# Altium PCB 4layer_main_board.PcbDoc
Units mm, origin at the board's own origin, x right, y up, seen from the top; angles counter-clockwise.
Board outline 50 x 100 mm, 4 copper layers (Top Layer, Int1 (GND), Int2 (PWR), Bottom Layer), stack 1.369 mm thick; 35 components, 28 nets, 214 pads, 441 vias.
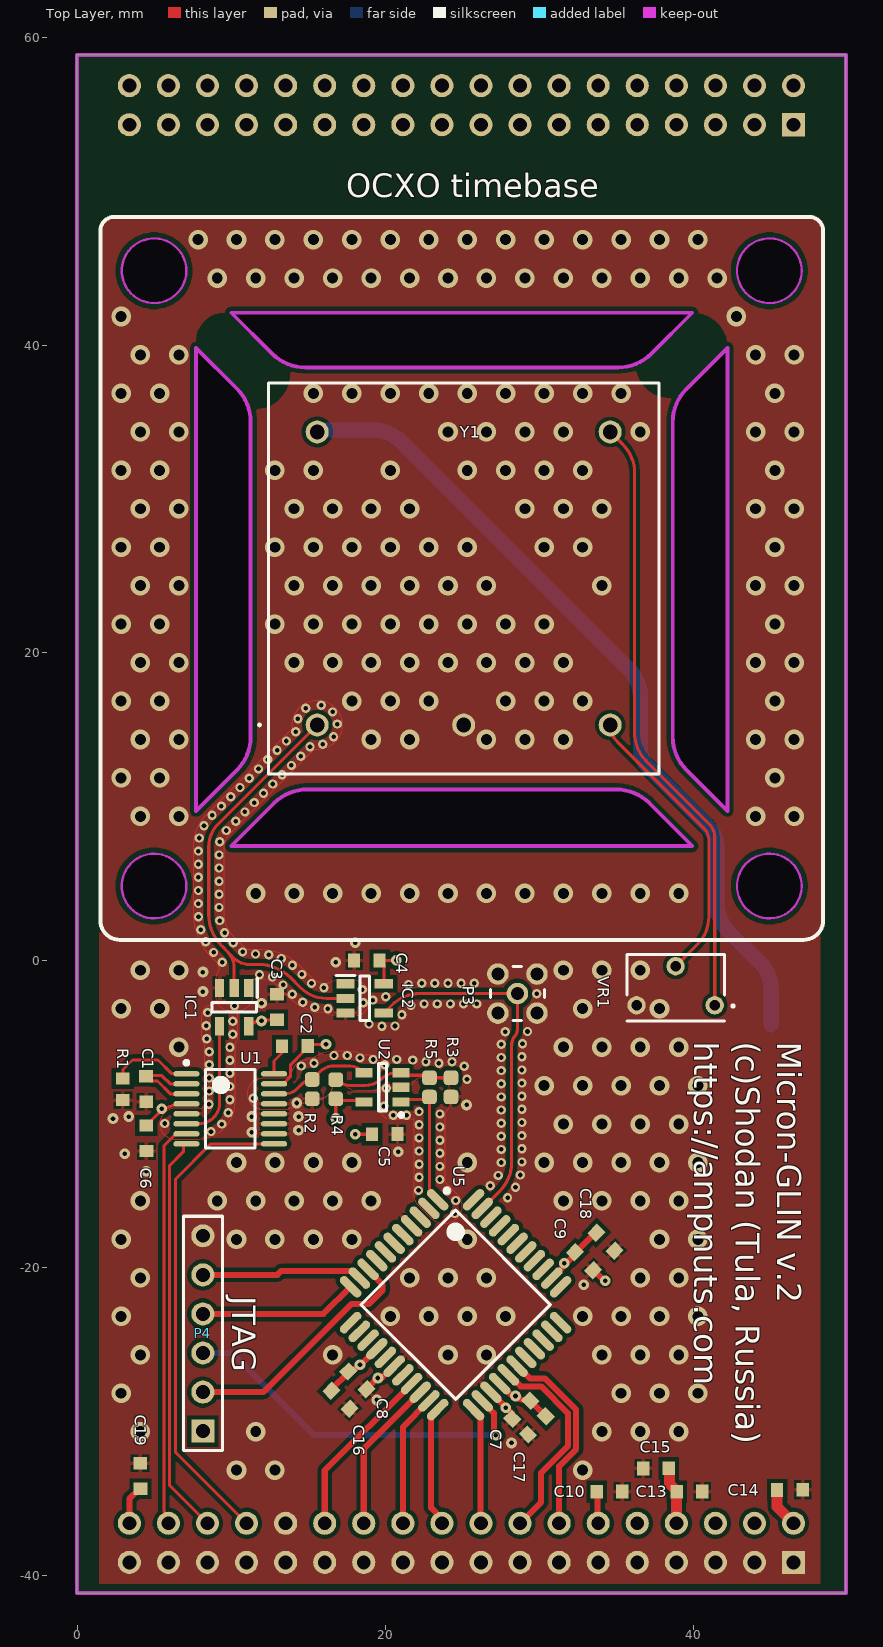
[diagram p0: Top Layer view]
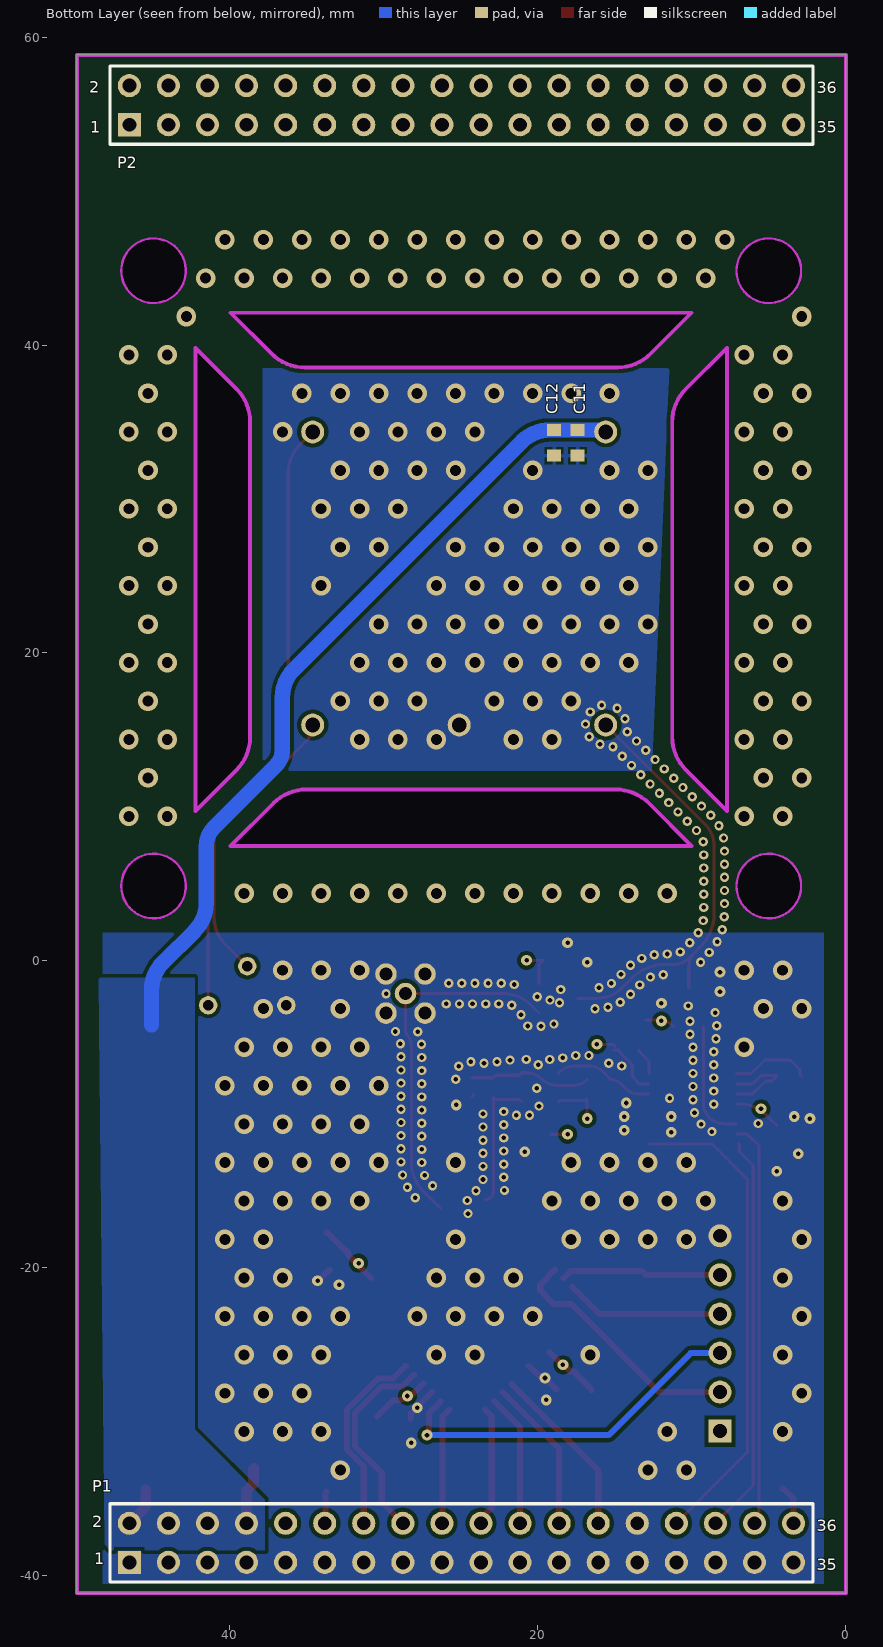
[diagram p1: Bottom Layer view, seen from below]
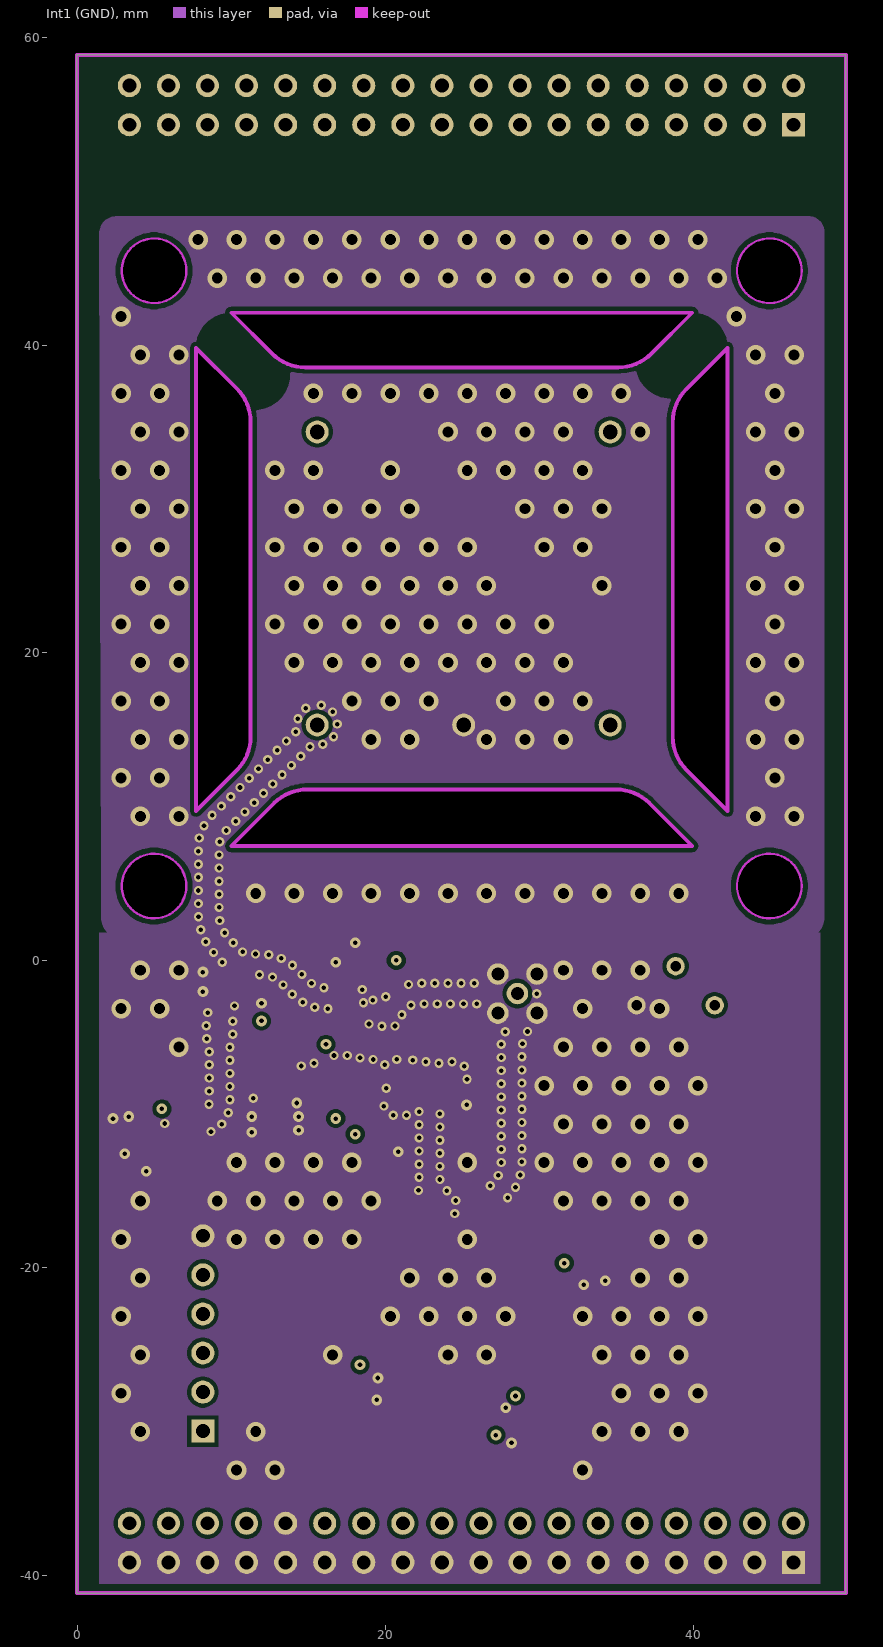
[diagram p2: Int1 (GND)]
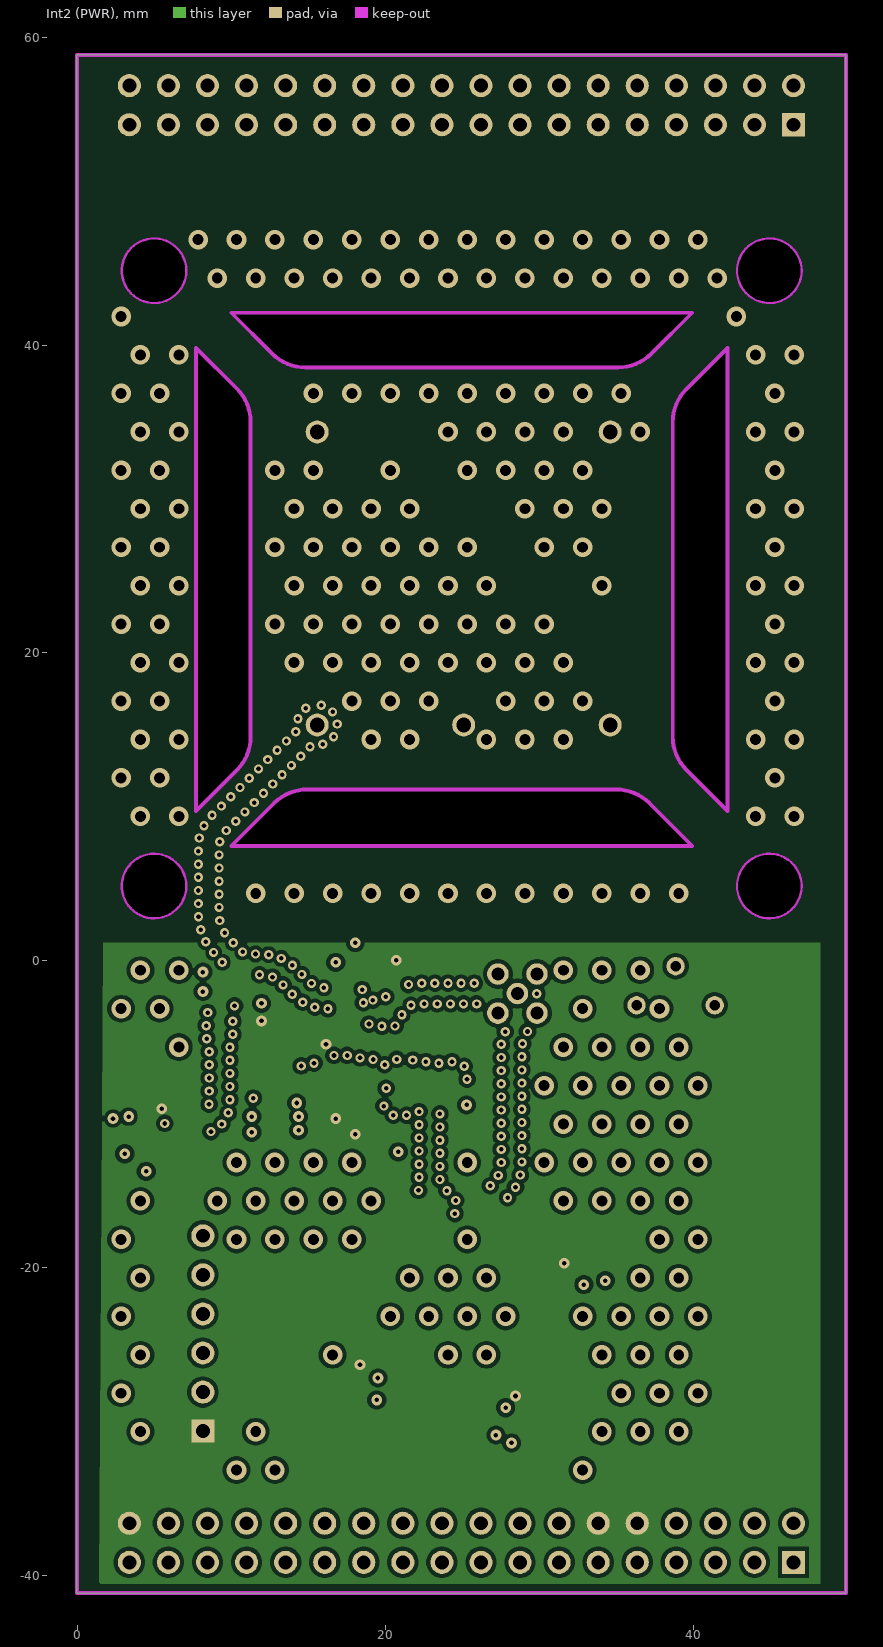
[diagram p3: Int2 (PWR)]

## Layer stack, top to bottom
Top Solder: solder mask 0.0254, SM-001, Dk 4
Top Layer: signal copper 0.035
Dielectric 1: prepreg 0.1295, PP-017, Dk 4.3
Dielectric 2: prepreg 0.1295, PP-017, Dk 4.3
Int1 (GND): signal copper 0.035
Dielectric 3: core 0.7112, Core-039, Dk 4.8
Int2 (PWR): signal copper 0.035
Dielectric 4: prepreg 0.1295, PP-017, Dk 4.3
Dielectric 5: prepreg 0.1295, PP-017, Dk 4.3
Bottom Layer: signal copper 0.035
Bottom Solder: solder mask 0.0254, SM-001, Dk 4

## Board outline
-0.063,-41.136 49.937,-41.136 49.937,58.864 -0.063,58.864
cut-out: 39.57,12.373 cw(c41.738,14.541) 38.672,14.541 38.672,34.988 cw(c41.738,34.988) 39.57,37.156 42.228,39.814 42.228,9.715
cut-out: 9.97,7.429 12.755,10.214 cw(c14.923,8.046) 14.923,11.112 34.989,11.112 cw(c34.989,8.046) 37.157,10.214 39.942,7.429
cut-out: 7.684,9.715 7.684,39.814 10.342,37.156 cw(c8.174,34.988) 11.24,34.988 11.24,14.541 cw(c8.174,14.541) 10.342,12.373
cut-out: 12.628,39.442 ccw(c14.796,41.61) 14.796,38.544 35.116,38.544 ccw(c35.116,41.61) 37.284,39.442 39.942,42.1 9.97,42.1
cut-out: 44.953,42.731 cw(c44.953,44.831) 42.853,44.831 cw(c44.953,44.831) 44.953,46.931 cw(c44.953,44.831) 47.053,44.831 cw(c44.953,44.831)
cut-out: 42.853,4.831 ccw(c44.953,4.831) 44.953,2.731 ccw(c44.953,4.831) 47.053,4.831 ccw(c44.953,4.831) 44.953,6.931 ccw(c44.953,4.831)
cut-out: 4.953,2.731 cw(c4.953,4.831) 2.853,4.831 cw(c4.953,4.831) 4.953,6.931 cw(c4.953,4.831) 7.053,4.831 cw(c4.953,4.831)
cut-out: 4.953,42.731 cw(c4.953,44.831) 2.853,44.831 cw(c4.953,44.831) 4.953,46.931 cw(c4.953,44.831) 7.053,44.831 cw(c4.953,44.831)

## Design rules (kind name [scope] priority, off if disabled: settings)
BoardOutlineClearance [All] p1: gap=0.381 ignorepadtopadclearanceinfootprint=FALSE
Clearance "Clearance Polygons" [InPolygon] p1: gap=0.254 ignorepadtopadclearanceinfootprint=FALSE except(0: Arc-Hole Track-Hole SMDPad-Hole THPad-Hole Via-Hole Fill-Hole Poly-Hole Region-Hole Text-Hole)
Clearance [All] p2: gap=0.127 ignorepadtopadclearanceinfootprint=FALSE except(0: Arc-Hole Track-Hole SMDPad-Hole THPad-Hole Via-Hole Fill-Hole Poly-Hole Region-Hole Text-Hole)
ComponentClearance "HM-TRP & UFL" [InComponent('X1') vs InComponent('U1')] p1: gap=0 collisioncheckmode=3 verticalgap=0 showdistances=FALSE
ComponentClearance [All] p2: gap=0.025 collisioncheckmode=3 verticalgap=0.025 showdistances=FALSE
DiffPairsRouting [All] p1: maxlimit=10 minlimit=0.127 mostfreqgap=0.203 toplayer_minwidth=0.127 toplayer_maxwidth=0.381 toplayer_prefwidth=0.203 midlayer1_minwidth=0.127 midlayer1_maxwidth=0.381 midlayer1_prefwidth=0.203 midlayer2_minwidth=0.127 midlayer2_maxwidth=0.381 midlayer2_prefwidth=0.203 bottomlayer_minwidth=0.127 bottomlayer_maxwidth=0.381 bottomlayer_prefwidth=0.203 maxuncoupledlength=12.7
HoleSize [All] p1: absolutevalues=TRUE maxlimit=6.731 minlimit=0.254 maxpercent=80.000 minpercent=20.000
HoleToHoleClearance [All] p1: gap=0.254 allowstackedmicrovias=FALSE
MinimumAnnularRing [All] p1: minimumring=0.102
MinimumSolderMaskSliver [All] p1: minsoldermaskwidth=0
PlaneClearance [All] p1: clearance=0.254
PlaneConnect [All] p1: planeconnectstyle=Relief reliefexpansion=0.102 reliefentries=4 reliefconductorwidth=0.152 reliefairgap=0.152
PolygonConnect PolygonConnect_pwr_gnd [IsPoly] p1: thpad.connectstyle=Direct thpad.reliefconductorwidth=0.254 thpad.reliefentries=4 thpad.polygonreliefangle="90 Angle" thpad.airgapwidth=0.152 smdpad.connectstyle=Relief smdpad.reliefconductorwidth=0.254 smdpad.reliefentries=4 smdpad.polygonreliefangle="90 Angle" smdpad.airgapwidth=0.152 via.connectstyle=Direct via.reliefconductorwidth=0.254 via.reliefentries=4 via.polygonreliefangle="90 Angle" via.airgapwidth=0.152
PolygonConnect PolygonConnect_1 [All] p2: connectstyle=Relief reliefconductorwidth=0.254 reliefentries=4 polygonreliefangle="90 Angle" airgapwidth=0.254
PolygonConnect "Via connect style" [isVia] p3: connectstyle=Direct reliefconductorwidth=0.254 reliefentries=4 polygonreliefangle="90 Angle" airgapwidth=0.254
RoutingCorners [All] p1: cornerstyle=45-Degree minsetback=1.25 maxsetback=1.25
RoutingVias [All] p1: holewidth=0.305 width=0.559 viastyle="Through Hole" minholewidth=0.254 minwidth=0.457 maxholewidth=2.54 maxwidth=2.896
SilkToSilkClearance [All] p1: silktosilkclearance=0
SilkToSolderMaskClearance [IsPad] p1: minsilkscreentomaskgap=0.127 clearancetoexposedcopper=TRUE
SolderMaskExpansion [All] p1: expansion=0.064 istentingtop=FALSE
Width GND [InNet('GND')] p1: maxlimit=0.762 minlimit=0.254 preferedwidth=0.508
Width Power [InNetClass('Power')] p2: maxlimit=1.016 minlimit=0.508 preferedwidth=0.762
Width 3V3 [InNetClass('3V3')] p3: maxlimit=0.762 minlimit=0.254 preferedwidth=0.508
Width [All] p4: maxlimit=10.16 minlimit=0.152 preferedwidth=0.203
20 further rules are at their usual default settings.

## Classes and differential pairs
component class v2: P1 P2
component class shcematics: C1 C2 C3 C4 C5 C6 C7 C8 C9 C10 C11 C12 C13 C14 C15 C16 C17 C18 C19 IC1 IC2 P3 P4 R1 R2 R3 R4 R5 U1 U2 U5 VR1 Y1

## Components (designator, comment, footprint, x,y, rotation, side; value= is the part's Value field where it differs from the comment)
C1 "10nF" "CAP 0603" 4.445,-8.382 r270 top
C2 "10nF" "CAP 0603" 14.097,-5.588 r180 top
C3 "100nF" "CAP 0603" 12.954,-3.048 r270 top
C4 "100nF" "CAP 0603" 18.796,0 r0 top
C5 "100nF" "CAP 0603" 19.939,-11.303 r180 top
C6 "100nF" "CAP 0603" 4.445,-11.557 r90 top
C7 "100nF" "CAP 0603" 28.829,-29.21 r45 top
C8 "100nF" "CAP 0603" 18.161,-27.305 r135 top
C9 "100nF" "CAP 0603" 32.893,-19.558 r135 top
C10 "100nF" "CAP 0603" 34.544,-34.544 r180 top
C11 "100nF" "CAP 0603" 17.399,33.655 r90 bottom
C12 "10uF" "CAP 0603" 18.923,33.655 r90 bottom
C13 "100nF" "CAP 0603" 39.751,-34.544 r180 top
C14 "10nF" "CAP 0603" 46.277,-34.427 r180 top
C15 "1uF" "CAP 0603" 37.592,-33.02 r0 top
C16 "10nF" "CAP 0603" 17.064,-28.554 r135 top
C17 "10nF" "CAP 0603" 29.845,-30.226 r45 top
C18 "10nF" "CAP 0603" 34.29,-18.288 r135 top
C19 "1uF" "CAP 0603" 4.064,-33.528 r270 top
IC1 "SN74LV1T34DBVR" SOT95P280X145-5N 10.16,-3.048 r270 top
IC2 "SN74LV1T34DBVR" SOT95P280X145-5N 18.649,-2.474 r0 top
P1 "Header 18X2" HDR2X18 46.527,-39.136 r180 bottom locked
P2 "Header 18X2" HDR2X18 46.527,54.324 r180 bottom locked
P3 "MMCX" MMCX2.54-V5 28.575,-2.159 r0 top
P4 "JTAG" HDR1X6 8.128,-30.607 r90 top
R1 "3.9K" 1608[0603] 2.921,-8.382 r270 top
R2 "300R" "Yegeo 0603" 15.24,-8.372 r90 top
R3 "10K" "Yegeo 0603" 24.257,-8.255 r270 top
R4 "50K" "Yegeo 0603" 16.764,-8.382 r270 top
R5 "100K" "Yegeo 0603" 22.86,-8.255 r90 top
U1 "AD9832BRUZ" ADI-RU-16_N 9.906,-9.652 r0 top
U2 "LTC6752HS5" TI-DBV5_N 19.812,-8.255 r180 top
U5 "XC9572XL-10VQG44C" VQG44_N 24.557,-22.387 r315 top
VR1 "3266W-1-103LF" 3266W 38.862,-3.941 r180 top
Y1 "Vectron C4550A1-0213" C4550C508SV120RFSA11128MHZ 15.558,15.303 r0 top locked

## Footprints (in the part's own frame and the unit in brackets; to place one, negate y for a bottom-side part, rotate by r counter-clockwise, add the part's x,y. Pads: shape width x height; smd on the part's side, far side on the other; paste and mask are expansions set on the pad)
1608[0603] [mm]
  rect 0.8x0.9 smd: 1(-0.7,0) 2(0.7,0)
  body extent -0.87,-0.48 0.87,0.48, height 1.3
3266W [mm]
  round 1.19 hole 0.69: 1(-2.54,-1.02) 2(0,-3.56) 3(2.54,-1.02)
  silkscreen extent -3.81,-4.31 3.18,0, body extent -3.4,-4.5 3.3,0, height 8.52
ADI-RU-16_N [mm]
  oval 1.7x0.35 smd: 1(-2.85,2.275) 2(-2.85,1.625) 3(-2.85,0.975) 4(-2.85,0.325) 5(-2.85,-0.325) 6(-2.85,-0.975) 7(-2.85,-1.625) 8(-2.85,-2.275) 9(2.85,-2.275) 10(2.85,-1.625) 11(2.85,-0.975) 12(2.85,-0.325) 13(2.85,0.325) 14(2.85,0.975) 15(2.85,1.625) 16(2.85,2.275)
  silkscreen extent -2.97,-2.55 1.6,3.12, body extent -2.25,-2.55 2.25,2.55, height 1.2
C4550C508SV120RFSA11128MHZ [mm]
  round 1.493 hole 0.96: 1(0,0) 2(9.525,0) 3(19.05,0) 4(19.05,19.05) 5(0,19.05)
  silkscreen extent -3.8,-3.17 22.22,22.22, body extent -3.17,-3.17 22.22,22.22, height 11.35
"CAP 0603" [mm] "Chip Capacitor, 2-Leads, Body 1,60x0,80mm, IPC Medium Density"
  rect 0.8x0.9 smd: 1(-0.84,-0.01) 2(0.82,0)
  body extent -0.85,-0.45 0.85,0.45, height 0.8
HDR1X6 [mm] "Connector; Header; 6 Position"
  rect 1.5x1.5 hole 0.9: 1(0,0)
  round 1.5 hole 0.9: 2(2.54,0) 3(5.08,0) 4(7.62,0) 5(10.16,0) 6(12.7,0)
  silkscreen extent -1.27,-1.27 13.97,1.27
HDR2X18 [mm] "Connector; Header; 18x2 Position"
  rect 1.5x1.5 hole 0.9: 1(0,0)
  round 1.5 hole 0.9: 2(0,2.54) 3(2.54,0) 4(2.54,2.54) 5(5.08,0) 6(5.08,2.54) 7(7.62,0) 8(7.62,2.54) 9(10.16,0) 10(10.16,2.54) 11(12.7,0) 12(12.7,2.54) 13(15.24,0) 14(15.24,2.54) 15(17.78,0) 16(17.78,2.54) 17(20.32,0) 18(20.32,2.54) 19(22.86,0) 20(22.86,2.54) 21(25.4,0) 22(25.4,2.54) 23(27.94,0) 24(27.94,2.54) 25(30.48,0) 26(30.48,2.54) 27(33.02,0) 28(33.02,2.54) 29(35.56,0) 30(35.56,2.54) 31(38.1,0) 32(38.1,2.54) 33(40.64,0) 34(40.64,2.54) 35(43.18,0) 36(43.18,2.54)
  silkscreen extent -1.27,-1.27 44.45,3.81
MMCX2.54-V5 [mm]
  round 1.4 hole 0.85: 1(0,0) 2(-1.27,-1.27) 3(1.27,-1.27) 4(1.27,1.27) 5(-1.27,1.27)
  silkscreen extent -1.75,-1.75 1.75,1.75, body extent -1.78,-1.75 1.73,1.75, height 4.42
SOT95P280X145-5N [mm]
  rect 1.2x0.6 smd: 1(-1.25,0.95) 2(-1.25,0) 3(-1.25,-0.95) 4(1.25,-0.95) 5(1.25,0.95)
  silkscreen extent -1.85,-1.45 0.3,1.5, body extent -1.4,-1.45 1.4,1.45, height 1.2
TI-DBV5_N [mm] "SOT23, 5-Leads, Body 2.9x1.6mm, Pitch 0.95mm, IPC Medium Density"
  rect 1.1x0.6 smd: 1(-1.2,0.95) 2(-1.2,0) 3(-1.2,-0.95) 4(1.2,-0.95) 5(1.2,0.95)
  silkscreen extent -1.33,-1.55 0.25,1.92, body extent -0.87,-1.52 0.87,1.53, height 1.45
VQG44_N [mm] "Thin QFP, 44-Leads, Body 10x10mm, Pitch 0.8mm, IPC Medium Density"
  oval 1.75x0.55 smd: 1(-5.65,4) 2(-5.65,3.2) 3(-5.65,2.4) 4(-5.65,1.6) 5(-5.65,0.8) 6(-5.65,0) 7(-5.65,-0.8) 8(-5.65,-1.6) 9(-5.65,-2.4) 10(-5.65,-3.2) 11(-5.65,-4) 23(5.65,-4) 24(5.65,-3.2) 25(5.65,-2.4) 26(5.65,-1.6) 27(5.65,-0.8) 28(5.65,0) 29(5.65,0.8) 30(5.65,1.6) 31(5.65,2.4) 32(5.65,3.2) 33(5.65,4)
  oval 0.55x1.75 smd: 12(-4,-5.65) 13(-3.2,-5.65) 14(-2.4,-5.65) 15(-1.6,-5.65) 16(-0.8,-5.65) 17(0,-5.65) 18(0.8,-5.65) 19(1.6,-5.65) 20(2.4,-5.65) 21(3.2,-5.65) 22(4,-5.65) 34(4,5.65) 35(3.2,5.65) 36(2.4,5.65) 37(1.6,5.65) 38(0.8,5.65) 39(0,5.65) 40(-0.8,5.65) 41(-1.6,5.65) 42(-2.4,5.65) 43(-3.2,5.65) 44(-4,5.65)
  silkscreen extent -5.77,-4.35 4.35,4.95, body extent -5,-5 5,5, height 1.2
"Yegeo 0603" [mm]
  rrect50% 0.95x0.95 smd: 1(-0.625,0) 2(0.625,0)
  body extent -0.85,-0.45 0.85,0.45, height 0.8

## Part data
C1 C2 C3 C4 C5 C6 C7 C8 C9 C10 C11 C12 C13 C14 C15 C16 C17 C18 C19: library part "Cap Semi", "Capacitor (Semiconductor SIM Model)", LatestRevisionDate=29-May-2009, LatestRevisionNote="IPC-7351 Footprint Added.", Order=CC0603KRX7R8BB104, PackageDescription="Chip Capacitor", PackageReference=C1206, Published=8-Jun-2000, Publisher="Altium Limited"
IC1 IC2: "Integrated Circuit", Manufacturer_Name="Texas Instruments", Mouser Part Number=595-SN74LV1T34DBVR, Arrow Part Number=SN74LV1T34DBVR, Arrow Price/Stock=https://www.arrow.com/en/products/sn74lv1t34dbvr/texas-instruments?region=nac, Datasheet Link=http://www.ti.com/lit/gpn/sn74lv1t34, Height=1.45mm, Manufacturer_Part_Number=SN74LV1T34DBVR, Mouser Price/Stock=https://www.mouser.co.uk/ProductDetail/Texas-Instruments/SN74LV1T34DBVR?qs=8sOby8ZxZLE4ekkxA3S6Wg%3D%3D
P1 P2: "Header, 18-Pin, Dual row", LatestRevisionDate=17-Jul-2002, LatestRevisionNote="Re-released for DXP Platform.", Publisher="Altium Limited"
P3: library part COAX-M, "RF Coaxial PCB Connector, MMCX; Thru-Hole, Vertical Mount Plug,  50 Ohm Impedance", PackageDocument="Rev. A, 16-Jun-1997", ComponentLink1Description="Manufacturer Link", ComponentLink1URL=http://www.amphenolrf.com/, DatasheetDocument=30-May-2003, DrillSize="Corresponds to nominal value.", LatestRevisionDate=15-Jul-2004, LatestRevisionNote="Component Replaced.", PackageReference=908-21103, PCB_Layout="Complies with manufacturer's recommendation.", Published=15-Jul-2004, Publisher="Altium Limited"
P4: library part "Header 6", "Header, 6-Pin", LatestRevisionDate=17-Jul-2002, LatestRevisionNote="Re-released for DXP Platform.", Publisher="Altium Limited"
R1 R2 R3 R4 R5: library part "Resistor 0805", Avail=20, Order=ERA-3AEB49R9V
U1: "25 MHz Direct Digital Synthesizer, Waveform Generator, 10-Bit, Serial, RU-16, 96 Tube, Pb-Free", Code_JEDEC=MO-153AB, Compliance Range (V)=1.35V, ComponentLink1Description="Manufacturer URL", ComponentLink1URL=www.analog.com, ComponentLink2Description=Datasheet, ComponentLink2URL=http://www.analog.com/static/imported-files/data_sheets/AD9832.pdf, ComponentLink3Description="Package Specification", ComponentLink3URL=http://www.analog.com/static/imported-files/packages/36244347913743854010197452789RU16.pdf, DatasheetVersion="Rev. C", FS Iout (mA nom)=4mA, I Supply total (max)=15mA, I/O Interface=Serial, Master fclk=25MHz, PackageDescription="16-Lead Thin Shrink Small Outline Package [TSSOP]", PackageReference=RU-16, PackageVersion=Nov-2002, REFCLK Multiplier=No, Resolution (Bits)=10bit, Tuning Word Width (bits)=32bit
U2: library part OPA353NA/250, "High-Speed, Single-Supply, Rail-to-Rail Operational Amplifier MicroAmplifier(TM) Series, 2.7 to 5.5 V, -40 to 85 degC, 5-pin SOT23 (DBV5), Green (RoHS & no Sb/Br)", Manufacturer="Texas Instruments", Rating=Catalog, Supplier Part Number 1=OPA353NATR-ND, Total Supply Voltage(Max)(+5V is 5, +/-5V is 10)=5.5, Total Supply Voltage(Min)(+5V is 5, +/-5V is 10)=2.7, CMRR(Min)(dB)=76, Code_JEDEC=MO-178, ComponentLink1Description="Manufacturer URL", ComponentLink1URL=http://www.ti.com/, ComponentLink2Description=Datasheet, ComponentLink2URL=http://www.ti.com/lit/ds/symlink/opa353.pdf, ComponentLink3Description="Package Specification", ComponentLink3URL=http://www.ti.com/litv/pdf/mpds018i, DatasheetVersion=SBOS103, Eco-Plan="Green (RoHS & no Sb/Br)", GBW(Typ)(MHz)=44, IIB(Max)(pA)=10, Iq per channel(Max)(mA)=8, Mounting Technology="Surface Mount", Number of Channels=1, Offset Drift(Typ)(uV/C)=5, PackageDescription="5-Pin Plastic Small Outline, Body 1.6 x 2.9 mm, Pitch 0.95 mm", PackageReference=DBV5, PackageVersion="4073253-4/K, 03/2006", Packing="SMALL T&R", PartNumber=OPA353NA/250, Slew Rate(Typ)(V/us)=22, Sub Family="High Output Current Amplifier (>=50mA), Low Input Bias Current Amp (<=10pA), Low Supply Voltage Amplifier (<=2.7V), Precision Amplifier", Supplier 1=Digi-Key, Supplier 2=Digi-Key, Supplier 3=Digi-Key, Supplier 4=Farnell, Supplier 5=Farnell, Supplier 6=Newark, Supplier 7=Mouser, Supplier Part Number 2=OPA353NACT-ND, Supplier Part Number 3=OPA353NADKR-ND, Supplier Part Number 4=1207049, Supplier Part Number 5=1207049RL, Supplier Part Number 6=35C1895, Supplier Part Number 7=595-OPA353NA/250, Vio (25C)(Max)(mV)=8
U5: "FastFLASH XC900XL, 3.3V High-Performance 72 Macrocell CPLD, 34 User I/Os, 44-Pin VQFP, Speed Grade 10, Commercial Grade, Pb-Free", Supplier Part Number 1=122-1448-ND, Code_JEDEC=MS-026-ACB, ComponentLink1Description="XC9572XL Datasheet", ComponentLink1URL=http://www.xilinx.com/support/documentation/data_sheets/ds057.pdf, ComponentLink2Description="VQG44 Package Drawing", ComponentLink2URL=http://www.xilinx.com/support/documentation/package_specs/vq44.pdf, ComponentLink3Description="XC9500XL Documents", ComponentLink3URL=http://www.xilinx.com/support/documentation/xc9500xl.htm, ComponentLink4Description="Xilinx.com Home", ComponentLink4URL=http://www.xilinx.com, DatasheetVersion="ver2.0 Apr-2007", LatestRevisionDate=18-Nov-2009, LatestRevisionNote="Updated to datasheet version 2.5 May-2009.", PackageDescription="44-Pin Very Thin Quad Flat Pack (VQG44) - Pb-Free", PackageReference=VQG44, PackageVersion="ver1.2, Jun-2004", Published=8-Sep-2006, Publisher="Altium Limited", Supplier 1=Digi-Key, Supplier 2=Farnell, Supplier 3=Newark, Supplier Part Number 2=1605849, Supplier Part Number 3=12N2472
VR1: "Variable Resistor", Manufacturer_Name=Bourns, Mouser Part Number=652-3266W-1-103LF, Arrow Part Number=3266W-1-103LF, Arrow Price/Stock=https://www.arrow.com/en/products/3266w-1-103lf/bourns?region=europe, Datasheet Link=https://datasheet.datasheetarchive.com/originals/distributors/SFDatasheet-6/sf-000139907.pdf, Manufacturer_Part_Number=3266W-1-103LF, Mouser Price/Stock=https://www.mouser.co.uk/ProductDetail/Bourns/3266W-1-103LF?qs=QKnmwoPQUtNACBkIqMvstg%3D%3D
Y1: library part C4550C508SV120RFSA1112.8MHZ, "Crystal or Oscillator", Manufacturer_Name=Vectron, Height=11.25mm, Manufacturer_Part_Number="Vectron C4550A1-0213"

## Via types
v1: diameter 1.27, hole 0.711, Top Layer to Bottom Layer, tented both sides, 243 vias
v2: diameter 0.6, hole 0.3, Top Layer to Bottom Layer, tented both sides, 166 vias
v3: diameter 0.7, hole 0.3, Top Layer to Bottom Layer, tented both sides, 32 vias

## Nets (pads, with @x,y where several pads share a name; then routed paths per layer and width w, separated by ;. In a path a pad name is that pad's centre, name@x,y a point inside that pad or via, vN(x,y) a via of type N, cw(c..) or ccw(c..) an arc to the next point about the centre after c; other vN are vias at no path point)
"10M out": IC2.4 P3.1 U5.43 | length 24.1
  Top Layer w0.203: IC2.4 20.42,-2.903 cw(c22.216,-4.699) 22.216,-2.159 P3.1 28.575,-4.464 cw(c27.84,-4.464) 28.507,-4.772 ; U5.43 27.45,-14.968 ccw(c25.654,-13.172) 28.194,-13.172 28.194,-5.619 cw(c29.495,-5.619) 28.36,-4.983 ; 28.36,-4.983 cw(c29.495,-5.619) 28.507,-4.772 ; 28.36,-4.983 ccw(c27.84,-4.464) 28.507,-4.772
"10MHz 3.3V": IC1.4 U1.6 | length 7.9
  Top Layer w0.203: U1.6 7.867,-10.627 ccw(c7.867,-9.284) 8.816,-10.234 ; 8.817,-10.233 ccw(c7.867,-9.284) 9.21,-9.284 IC1.4
"10MHz 5V": IC1.2 IC2.2 Y1.1 | length 28.8
  Top Layer w0.203: 8.509,7.387 8.509,3.01 ccw(c11.483,3.01) 9.38,0.907 9.711,0.576 cw(c8.627,-0.508) 10.16,-0.508 IC1.2 ; 8.509,7.388 cw(c10.594,7.39) 9.123,8.868 Y1.1 ; 9.906,0.381 10.15,0.137 ccw(c11.116,1.104) 11.116,-0.263 11.726,-0.263 cw(c11.727,-3.246) 13.838,-1.138 14.478,-1.778 ccw(c16.158,-0.098) 16.158,-2.474 IC2.2
+3.3V: C2.1 C3.2 C4.2 C5.2 C6.2 C7.2 C8.2 C9.2 C10.2 C16.2 C17.2 C18.2 C19.2 IC1.5 IC2.5 P1.10 P1.12 P1.36 P4.1 R4.2 U1.4 U1.15 U2.5 U5.15 U5.26 U5.35 | length 33.5
  Top Layer w0.203: C6.2 5.111,-10.071 cw(c6.907,-11.867) 6.907,-9.327 U1.4 ; IC1.5 cw(c12.148,-5.336) 12.148,-3.868 C3.2 ; U1.15 13.391,-8.027 13.504,-7.914 13.504,-7.874 13.834,-7.544 13.834,-6.782 14.639,-5.978 14.639,-5.927 14.733,-5.832 C2.1@15.064,-5.832 ; C2.1 15.054,-5.461 v3(16.129,-5.461) ; v3(16.764,-10.287) R4.2 16.863,-9.106 18.513,-9.106 U2.5 ; v3(18.034,-11.303) C5.2 ; IC2.5 19.899,-0.283 C4.2 v3(20.701,0)
  Top Layer w0.4: P1.36 3.347,-35.015 4.014,-34.348 C19.2 ; C16.2 16.484,-27.898 17.581,-26.802 C8.2 17.864,-26.725 18.296,-26.294 18.387,-26.294 U5.15@19.204,-25.477 ; U5.26 27.921,-28.014 ccw(c29.409,-26.526) C7.2 C17.2 ; U5.35 32.188,-19.281 ccw(c31.884,-18.978) C9.2 32.377,-18.978 33.647,-17.708 C18.2 ; C10.2 33.776,-34.596 33.776,-36.544 P1.12
  other v3: 28.448,-28.321 18.341,-26.294 31.623,-19.685 5.461,-9.652 11.938,-3.937
+5V: C11.2 C12.2 C13.2 C14.2 C15.2 P1.2 P1.4 P1.6 P1.8 Y1.5 | length 59.6
  Top Layer w0.7: C15.2 38.462,-33.07 38.462,-34.025 38.919,-34.482 38.919,-36.584 P1.8 ; C14.2 45.457,-35.526 P1.2
  Bottom Layer w1: Y1.5 15.558,34.475 C11.2 C12.2 19.21,34.475 cw(c19.21,31.935) 21.006,33.731 35.832,18.905 cw(c34.036,17.109) 36.576,17.109 36.576,13.716 ccw(c38.109,13.716) 37.025,12.632 41.021,8.636 cw(c39.795,7.41) 41.529,7.41 41.529,3.719 ccw(c44.069,3.719) 42.273,1.923 44.341,-0.145 cw(c42.545,-1.941) 45.085,-1.941 45.085,-4.191
CMOS: R5.1 U2.1 U5.1 | length 9
  Top Layer w0.203: U2.1 21.175,-9.042 22.698,-9.042 R5.1 22.86,-15.033 ccw(c23.39,-15.033) U5.1
COUNT_EN: P1.14 U5.28 | length 12.8
  Top Layer w0.4: U5.28 28.592,-26.382 29.385,-27.175 30.35,-27.175 32.385,-29.21 32.385,-31.795 31.287,-32.893 P1.14
CPU_IRQ: P1.18 U5.23 | length 7.6
  Top Layer w0.4: U5.23 26.176,-29.663 26.176,-36.565 P1.18
DAC_LDAC: P1.16 U5.27 | length 13.3
  Top Layer w0.4: U5.27 28.027,-26.948 28.781,-27.702 30.115,-27.702 31.858,-29.445 31.858,-31.577 30.115,-33.32 30.115,-35.228 P1.16
DGND: C1.2 C3.1 C4.1 C5.1 C6.1 C7.1 C8.1 C9.1 C10.1 C11.1 C12.1 C13.1 C14.1 C15.1 C16.1 C17.1 C18.1 C19.1 IC1.3 IC2.3 P1.1 P1.3 P1.5 P1.7 P1.9 P1.11 P1.13 P1.15 P1.17 P1.19 P1.21 P1.23 P1.25 P1.27 P1.28 P1.29 P1.31 P1.33 P1.35 P3.2 P3.3 P3.4 P3.5 P4.6 R1.2 R2.1 R3.2 U1.5 U1.10 U1.11 U1.12 U1.13 U2.2 U5.4 U5.17 U5.25 VR1.3 Y1.2 | length 6
  Top Layer w0.203: R3.2@24.123,-8.746 R3.2
  Top Layer w0.4: C8.1 v3(19.505,-27.149) 19.753,-27.149 20.521,-26.382 U5.17 ; U5.25 28.207,-29.431 28.207,-29.776 C7.1 ; C9.1 33.55,-20.145 34.234,-20.828 v3(34.29,-20.828)
  other v1: 10.313,-33.143 12.813,-33.143 32.813,-33.143 4.063,-30.643 11.563,-30.643 34.063,-30.643 36.563,-30.643 39.063,-30.643 2.813,-28.143 35.313,-28.143 37.813,-28.143 40.313,-28.143 4.063,-25.643 16.563,-25.643 24.063,-25.643 26.563,-25.643 34.063,-25.643 36.563,-25.643 39.063,-25.643 2.813,-23.143 20.313,-23.143 22.813,-23.143 25.313,-23.143 27.813,-23.143 32.813,-23.143 35.313,-23.143 37.813,-23.143 40.313,-23.143 4.063,-20.643 21.563,-20.643 24.063,-20.643 26.563,-20.643 36.563,-20.643 39.063,-20.643 2.813,-18.143 10.313,-18.143 12.813,-18.143 15.313,-18.143 17.813,-18.143 25.313,-18.143 37.813,-18.143 40.313,-18.143 4.063,-15.643 9.063,-15.643 11.563,-15.643 14.063,-15.643 16.563,-15.643 19.063,-15.643 31.563,-15.643 34.063,-15.643 36.563,-15.643 39.063,-15.643 10.313,-13.143 12.813,-13.143 15.313,-13.143 17.813,-13.143 25.313,-13.143 30.313,-13.143 32.813,-13.143 35.313,-13.143 37.813,-13.143 40.313,-13.143 31.563,-10.643 34.063,-10.643 36.563,-10.643 39.063,-10.643 30.313,-8.143 32.813,-8.143 35.313,-8.143 37.813,-8.143 40.313,-8.143 6.563,-5.643 31.563,-5.643 34.063,-5.643 36.563,-5.643 39.063,-5.643 2.813,-3.143 5.313,-3.143 32.813,-3.143 37.813,-3.143 4.063,-0.643 6.563,-0.643 31.563,-0.643 34.063,-0.643 36.563,-0.643 11.563,4.357 14.063,4.357 16.563,4.357 19.063,4.357 21.563,4.357 24.063,4.357 26.563,4.357 29.063,4.357 31.563,4.357 34.063,4.357 36.563,4.357 39.063,4.357 4.063,9.357 6.563,9.357 44.063,9.357 46.563,9.357 2.813,11.857 5.313,11.857 45.313,11.857 4.063,14.357 6.563,14.357 19.063,14.357 21.563,14.357 26.563,14.357 29.063,14.357 31.563,14.357 44.063,14.357 46.563,14.357 2.813,16.857 5.313,16.857 17.813,16.857 20.313,16.857 22.813,16.857 27.813,16.857 30.313,16.857 32.813,16.857 45.313,16.857 4.063,19.357 6.563,19.357 14.063,19.357 16.563,19.357 19.063,19.357 21.563,19.357 24.063,19.357 26.563,19.357 29.063,19.357 31.563,19.357 44.063,19.357 46.563,19.357 2.813,21.857 5.313,21.857 12.813,21.857 15.313,21.857 17.813,21.857 20.313,21.857 22.813,21.857 25.313,21.857 27.813,21.857 30.313,21.857 45.313,21.857 4.063,24.357 6.563,24.357 14.063,24.357 16.563,24.357 19.063,24.357 21.563,24.357 24.063,24.357 26.563,24.357 34.063,24.357 44.063,24.357 46.563,24.357 2.813,26.857 5.313,26.857 12.813,26.857 15.313,26.857 17.813,26.857 20.313,26.857 22.813,26.857 25.313,26.857 30.313,26.857 32.813,26.857 45.313,26.857 4.063,29.357 6.563,29.357 14.063,29.357 16.563,29.357 19.063,29.357 21.563,29.357 29.063,29.357 31.563,29.357 34.063,29.357 44.063,29.357 46.563,29.357 2.813,31.857 5.313,31.857 12.813,31.857 15.313,31.857 20.313,31.857 25.313,31.857 27.813,31.857 30.313,31.857 32.813,31.857 45.313,31.857 4.063,34.357 6.563,34.357 24.063,34.357 26.563,34.357 29.063,34.357 31.563,34.357 36.563,34.357 44.063,34.357 46.563,34.357 2.813,36.857 5.313,36.857 15.313,36.857 17.813,36.857 20.313,36.857 22.813,36.857 25.313,36.857 27.813,36.857 30.313,36.857 32.813,36.857 35.313,36.857 45.313,36.857 4.063,39.357 6.563,39.357 44.063,39.357 46.563,39.357 2.813,41.857 42.813,41.857 9.063,44.357 11.563,44.357 14.063,44.357 16.563,44.357 19.063,44.357 21.563,44.357 24.063,44.357 26.563,44.357 29.063,44.357 31.563,44.357 34.063,44.357 36.563,44.357 39.063,44.357 41.563,44.357 7.813,46.857 10.313,46.857 12.813,46.857 15.313,46.857 17.813,46.857 20.313,46.857 22.813,46.857 25.313,46.857 27.813,46.857 30.313,46.857 32.813,46.857 35.313,46.857 37.813,46.857 40.313,46.857
  other v2: 24.508,-16.461 24.56,-15.609 27.938,-15.428 23.993,-14.971 22.146,-14.956 28.45,-14.745 26.81,-14.654 23.535,-14.25 22.185,-14.103 27.333,-13.979 28.764,-13.951 23.535,-13.396 22.185,-13.249 27.519,-13.145 28.869,-13.103 23.535,-12.542 22.185,-12.395 27.519,-12.291 28.869,-12.249 23.535,-11.688 22.185,-11.541 27.519,-11.437 28.869,-11.395 8.654,-11.133 23.535,-10.834 22.185,-10.687 9.355,-10.645 5.649,-10.605 27.519,-10.583 28.869,-10.541 20.511,-10.07 21.365,-10.07 23.535,-9.98 9.784,-9.906 22.185,-9.833 27.519,-9.729 28.869,-9.687 19.897,-9.476 8.527,-9.354 9.885,-9.058 11.405,-8.958 27.519,-8.875 28.869,-8.833 8.535,-8.5 20.042,-8.319 9.885,-8.204 27.519,-8.021 28.869,-7.979 25.302,-7.726 8.535,-7.646 9.885,-7.35 27.519,-7.167 28.869,-7.125 25.119,-6.891 14.52,-6.867 8.535,-6.792 19.945,-6.782 15.354,-6.683 23.474,-6.687 22.626,-6.585 24.322,-6.585 9.885,-6.496 21.778,-6.483 19.193,-6.446 20.727,-6.44 18.345,-6.345 27.519,-6.313 28.869,-6.271 16.653,-6.183 17.507,-6.183 8.535,-5.938 9.885,-5.642 27.532,-5.459 28.905,-5.418 8.385,-5.098 10.075,-4.81 27.779,-4.642 29.232,-4.629 19.767,-4.289 8.345,-4.244 20.621,-4.265 18.926,-4.141 10.075,-3.956 21.064,-3.535 8.445,-3.396 16.255,-3.149 15.407,-3.049 10.185,-2.963 21.66,-2.923 22.509,-2.834 23.363,-2.834 24.217,-2.834 25.071,-2.834 25.925,-2.834 18.564,-2.754 14.617,-2.724 19.183,-2.582 20.009,-2.367 13.944,-2.199 29.837,-2.171 18.484,-1.903 15.993,-1.787 13.34,-1.595 21.503,-1.573 15.19,-1.498 22.353,-1.484 23.207,-1.484 24.061,-1.484 24.915,-1.484 25.769,-1.484 12.652,-1.089 11.812,-0.938 14.568,-0.913 13.948,-0.326 9.392,-0.122 13.222,0.124 12.404,0.368 11.551,0.412 8.825,0.517 10.708,0.55 10.096,1.146 8.319,1.205 9.538,1.792 7.984,1.99 9.224,2.586 7.845,2.833 9.184,3.44 7.834,3.687 9.184,4.294 7.834,4.541 9.184,5.148 7.834,5.395 9.184,6.002 7.834,6.249 9.184,6.856 7.834,7.103 9.221,7.709 7.896,7.955 9.654,8.445 8.202,8.752 10.258,9.049 8.727,9.426 10.862,9.653 9.33,10.03 11.466,10.257 9.934,10.634 12.07,10.86 10.538,11.237 12.673,11.464 11.142,11.841 13.277,12.068 11.746,12.445 13.881,12.672 12.35,13.049 14.485,13.276 12.954,13.653 15.089,13.88 15.927,14.045 13.558,14.257 16.624,14.538 14.161,14.861 16.87,15.356 14.307,15.702 16.56,16.152 14.817,16.387 15.827,16.59
  other v3: 28.194,-31.369 27.813,-29.083 19.431,-28.575 32.893,-21.082 4.445,-13.716 3.048,-12.573 20.828,-12.446 11.303,-11.176 14.351,-11.049 2.286,-10.287 3.302,-10.16 11.303,-10.16 14.351,-10.16 25.273,-9.398 14.224,-9.271 11.938,-2.794 8.128,-2.032 8.128,-0.762 16.764,-0.127 18.034,1.143
Freq_control_b0: P1.20 U5.22 | length 7.9
  Top Layer w0.4: U5.22 22.966,-29.635 22.966,-35.597 23.667,-36.298 P1.20
Freq_control_b1: P1.22 U5.21 | length 8.7
  Top Layer w0.4: P1.22 21.127,-30.342 U5.21
Freq_control_b2: P1.24 U5.20 | length 10
  Top Layer w0.4: P1.24 18.587,-31.751 U5.20
Freq_control_b3: P1.26 U5.19 | length 11.4
  Top Layer w0.4: P1.26 16.047,-33.159 U5.19
Hysteresis: R3.1 R4.1 R5.2 U2.3 | length 7.9
  Top Layer w0.203: R4.1 ccw(c17.66,-6.861) 17.144,-8.018 ccw(c17.66,-6.861) 17.653,-8.128 ccw(c17.66,-6.861) 17.66,-8.128 18.722,-8.128 ccw(c18.722,-6.723) 19.716,-7.716 ; 19.716,-7.716 cw(c20.709,-8.71) 20.709,-7.305 U2.3 21.174,-7.468 22.698,-7.468 R5.2 R3.1
NetC1_1: C1.1 U1.2 U1.3 | length 6
  Top Layer w0.203: U1.3 6.01,-8.677 5.173,-7.84 4.734,-7.84 C1.1 4.484,-7.493 5.461,-7.493 5.995,-8.027 U1.2
NetC2_2: C2.2 U1.16 | length 1.8
  Top Layer w0.203: U1.16 12.756,-6.54 13.404,-5.892 C2.2@13.404,-5.842
NetP4_2: P4.2 U5.9 | length 16.2
  Top Layer w0.4: P4.2 12.065,-28.067 17.78,-22.352 18.923,-22.352 19.812,-21.463 19.812,-21.077 18.864,-20.129 U5.9
NetP4_3: P4.3 U5.24 | length 23.8
  Top Layer w0.4: U5.24 26.289,-28.685 27.051,-29.447 27.051,-30.734 v3(27.178,-30.861)
  Bottom Layer w0.4: P4.3 10.033,-25.527 15.367,-30.861 v3(27.178,-30.861)
NetP4_4: P4.4 U5.11 | length 10.3
  Top Layer w0.4: P4.4 15.966,-22.987 U5.11
NetP4_5: P4.5 U5.10 | length 10.5
  Top Layer w0.4: P4.5 12.971,-20.447 13.224,-20.194 17.558,-20.194 17.566,-20.202 17.846,-20.202 U5.10
NetR1_1: R1.1 U1.1 | length 5.3
  Top Layer w0.203: R1.1@2.794,-7.555 2.937,-7.412 2.937,-7.096 3.556,-6.477 5.207,-6.477 6.079,-7.349 7.028,-7.349 U1.1
NetVR1_1: VR1.1 Y1.4 | length 39.8
  Top Layer w0.203: Y1.4 35.451,33.51 cw(c33.655,31.714) 36.195,31.714 36.195,14.768 ccw(c38.735,14.768) 36.939,12.972 41.043,8.868 cw(c40.176,8.001) 41.402,8.001 VR1.1
NetVR1_2: VR1.2 Y1.3 | length 19
  Top Layer w0.203: Y1.3 ccw(c36.141,15.303) 34.831,14.507 ccw(c36.141,15.303) 35.057,14.219 40.726,8.55 cw(c40.014,7.838) 41.021,7.838 41.021,2.83 cw(c38.481,2.83) 40.277,1.034 VR1.2
SPI2_MOSI: P1.32 U1.8 | length 26.1
  Top Layer w0.203: U1.8@6.907,-11.927 6.858,-11.976 6.858,-12.446 5.969,-13.335 5.969,-34.138 P1.32
SPI2_NSS: P1.30 U1.9 | length 31.6
  Top Layer w0.203: P1.30 6.35,-31.979 6.35,-14.224 8.647,-11.927 U1.9
SPI2_SCK: P1.34 U1.7 | length 26.4
  Top Layer w0.203: P1.34 5.639,-36.348 5.639,-35.879 5.588,-35.829 5.588,-12.07 6.381,-11.277 U1.7
"Syntesis freq": R2.2 U1.14 U2.4 | length 6.6
  Top Layer w0.203: U1.14 13.476,-8.677 ccw(c13.476,-7.584) 14.249,-8.357 14.59,-8.016 cw(c15.24,-8.667) R2.2 15.77,-7.217 cw(c16.637,-8.084) 16.637,-6.858 17.533,-6.858 cw(c17.533,-8.384) U2.4
pads on no net: IC1.1 IC2.1 P2.1 P2.2 P2.3 P2.4 P2.5 P2.6 P2.7 P2.8 P2.9 P2.10 P2.11 P2.12 P2.13 P2.14 P2.15 P2.16 P2.17 P2.18 P2.19 P2.20 P2.21 P2.22 P2.23 P2.24 P2.25 P2.26 P2.27 P2.28 P2.29 P2.30 P2.31 P2.32 P2.33 P2.34 P2.35 P2.36 U5.2 U5.3 U5.5 U5.6 U5.7 U5.8 U5.12 U5.13 U5.14 U5.16 U5.18 U5.29 U5.30 U5.31 U5.32 U5.33 U5.34 U5.36 U5.37 U5.38 U5.39 U5.40 U5.41 U5.42 U5.44

## Polygon pours and split planes (outlines as drawn)
DGND on Top Layer "Top Layer-DGND 1" (solid, pour order 32): 256 vertices, not listed, extent 18.433,-17.698 30.14,-0.594
DGND on Top Layer "Top Layer-DGND" (solid, pour order 31): 156 vertices, not listed, extent 19.596,-17.133 24.959,-7.534
DGND on Top Layer "Top Layer-DGND 2" (solid, pour order 19): 258 vertices, not listed, extent 7.531,-3.64 18.865,16.915
DGND on Top Layer "Top Layer-DGND 3" (solid, pour order 18): 181 vertices, not listed, extent 11.038,-9.722 20.028,-5.879
DGND on Top Layer "Top Layer-DGND 4" (solid, pour order 17): 257 vertices, not listed, extent 15.418,-9.108 25.603,-6.139
DGND on Top Layer "Top Layer-DGND 5" (solid, pour order 15): 9.734,-2.861 9.943,-2.948 10.123,-3.085 10.26,-3.265 10.347,-3.474 10.376,-3.698 10.376,-4.898 10.347,-5.122 10.26,-5.331 10.186,-5.428 10.186,-9.252 10.19,-9.284 10.183,-9.34 10.183,-9.397 10.133,-9.774 10.091,-9.934 10.075,-9.992 9.929,-10.344 9.858,-10.468 9.816,-10.54 9.585,-10.841 9.584,-10.842 9.545,-10.882 9.511,-10.925 9.51,-10.927 9.508,-10.928 9.465,-10.962 9.425,-11.001 9.424,-11.002 9.123,-11.233 8.927,-11.346 8.575,-11.492 8.357,-11.55 8.162,-11.576 8.129,-11.587 8.078,-11.612 8.022,-11.623 7.968,-11.642 7.9,-11.655 7.815,-11.661 7.731,-11.672 6.381,-11.672 6.297,-11.661 6.212,-11.655 6.144,-11.642 6.09,-11.623 6.034,-11.612 5.983,-11.587 5.929,-11.569 5.882,-11.537 5.831,-11.512 5.773,-11.474 5.731,-11.436 5.684,-11.405 5.646,-11.362 5.603,-11.324 5.572,-11.277 5.534,-11.235 5.496,-11.177 5.471,-11.126 5.439,-11.079 5.421,-11.025 5.396,-10.974 5.385,-10.918 5.366,-10.864 5.353,-10.796 5.349,-10.739 5.338,-10.684 5.342,-10.627 5.338,-10.57 5.349,-10.515 5.353,-10.458 5.366,-10.39 5.385,-10.336 5.396,-10.28 5.421,-10.229 5.439,-10.175 5.471,-10.128 5.496,-10.077 5.534,-10.019 5.572,-9.977 5.603,-9.93 5.646,-9.892 5.684,-9.849 5.731,-9.818 5.773,-9.78 5.831,-9.742 5.882,-9.717 5.929,-9.685 5.983,-9.667 6.034,-9.642 6.09,-9.631 6.144,-9.612 6.212,-9.599 6.297,-9.593 6.381,-9.582 7.731,-9.582 7.815,-9.593 7.9,-9.599 7.968,-9.612 7.997,-9.622 8.049,-9.6 8.125,-9.542 8.183,-9.466 8.22,-9.378 8.234,-9.274 8.234,-5.428 8.16,-5.331 8.073,-5.122 8.044,-4.898 8.044,-3.698 8.073,-3.474 8.16,-3.265 8.297,-3.085 8.477,-2.948 8.686,-2.861 8.91,-2.832 9.51,-2.832
DGND on Top Layer "DGND_L01_P011" (solid, pour order 11): 1.397,1.778 48.26,1.778 48.26,-40.513 1.397,-40.513
DGND on Top Layer "DGND_L01_P000" (solid, pour order 0): 1.524,4.699 1.524,2.794 ccw(c2.921,2.794) 2.921,1.397 47.117,1.397 ccw(c47.117,2.794) 48.514,2.794 48.514,47.371 ccw(c47.498,47.371) 47.498,48.387 2.54,48.387 ccw(c2.54,47.244) 1.397,47.244
DGND on Int1 (GND) "DGND_L02_P012" (solid, pour order 12): 1.397,1.778 48.26,1.778 48.26,-40.513 1.397,-40.513
DGND on Int1 (GND) "DGND_L02_P001" (solid, pour order 1): 1.524,4.699 1.524,2.794 ccw(c2.921,2.794) 2.921,1.397 47.117,1.397 ccw(c47.117,2.794) 48.514,2.794 48.514,47.371 ccw(c47.498,47.371) 47.498,48.387 2.54,48.387 ccw(c2.54,47.244) 1.397,47.244
DGND on Bottom Layer "DGND_L04_P027" (solid, pour order 27): 1.397,1.778 48.26,1.778 48.26,-40.513 1.397,-40.513
+5V on Bottom Layer "+5V_L04_P026" (solid, pour order 26): 48.514,-1.143 42.291,-1.143 42.291,-30.48 37.719,-35.052 37.719,-38.354 47.752,-38.354 48.133,-37.973
DGND on Bottom Layer "DGND_L04_P022" (solid, pour order 22): 11.43,38.481 37.846,38.481 37.846,12.319 12.573,12.319
+3.3V on Int2 (PWR) "+3.3V_L03_P030" (solid, pour order 30): 1.651,1.143 48.26,1.143 48.26,-40.513 1.397,-40.513

## Keep-outs
Keep-Out Layer:
  circle w0.15: c4.953,4.831 r2.1
  circle w0.15: c44.953,44.831 r2.1
  circle w0.15: c44.953,4.831 r2.1
  circle w0.15: c4.953,44.831 r2.1
  lines w0.254: -0.063,-41.136 49.937,-41.136 49.937,58.864 0.318,58.864 -0.063,58.864 -0.063,57.594 -0.063,-20.13 -0.063,-41.136 ; 7.684,9.715 10.336,12.367 ccw(c8.168,14.535) 11.234,14.535 11.234,34.994 ccw(c8.168,34.994) 10.336,37.162 7.684,39.814 7.684,9.715 ; 9.97,7.429 12.755,10.214 cw(c14.923,8.046) 14.923,11.112 34.989,11.112 cw(c34.989,8.046) 37.157,10.214 39.942,7.429 9.97,7.429 ; 9.97,42.1 12.628,39.442 ccw(c14.796,41.61) 14.796,38.544 32.449,38.544 35.116,38.544 ccw(c35.116,41.61) 37.284,39.442 39.942,42.1 9.97,42.1 ; 38.672,14.541 ccw(c41.738,14.541) 39.57,12.373 42.228,9.715 42.228,39.814 39.57,37.156 ccw(c41.738,34.988) 38.672,34.988 38.672,14.541

## Other copper
Top Layer:
  pour cut-out: 39.942,42.1 cw(c39.942,39.814) 42.228,39.814 42.228,39.106 cw(c39.688,39.106) 39.688,36.566 38.501,36.566 cw(c38.501,38.777) 36.289,38.777
  pour cut-out: 10.301,41.958 ccw(c9.582,40.202) 7.684,40.202 7.684,38.387 ccw(c10.224,38.387) 10.224,35.847 11.523,35.847 ccw(c11.523,38.085) 13.762,38.085 13.762,39.16
  pour cut-out: 230 vertices and 0 holes, not listed, extent 19.045,-17.083 29.533,-1.201
  pour cut-out: 23.122,-8.151 23.147,-8.151 23.24,-8.17 23.331,-8.208 23.41,-8.26 23.445,-8.295 23.48,-8.33 23.532,-8.409 23.57,-8.5 23.589,-8.593 23.589,-8.618 23.593,-8.642 23.593,-9.118 23.589,-9.142 23.589,-9.167 23.57,-9.26 23.532,-9.351 23.48,-9.43 23.445,-9.465 23.41,-9.5 23.331,-9.552 23.24,-9.59 23.224,-9.593 23.224,-14.676 23.305,-14.73 23.323,-14.747 23.343,-14.761 24.192,-15.61 24.206,-15.631 24.223,-15.648 24.284,-15.739 24.322,-15.831 24.343,-15.938 24.343,-16.037 24.322,-16.144 24.284,-16.236 24.223,-16.327 24.153,-16.397 24.062,-16.458 23.971,-16.496 23.864,-16.517 23.765,-16.517 23.657,-16.496 23.566,-16.458 23.475,-16.397 23.457,-16.379 23.436,-16.365 22.588,-15.517 22.574,-15.496 22.556,-15.478 22.496,-15.387 22.458,-15.296 22.436,-15.189 22.436,-15.09 22.458,-14.982 22.496,-14.891 22.496,-14.89 22.496,-9.593 22.48,-9.59 22.389,-9.552 22.31,-9.5 22.275,-9.465 22.24,-9.43 22.224,-9.406 21.816,-9.406 21.816,-9.505 21.796,-9.602 21.741,-9.684 21.659,-9.739 21.562,-9.759 20.462,-9.759 20.365,-9.739 20.283,-9.684 20.228,-9.602 20.208,-9.505 20.208,-8.905 20.228,-8.808 20.283,-8.726 20.365,-8.671 20.462,-8.651 21.562,-8.651 21.659,-8.671 21.672,-8.679 22.127,-8.679 22.127,-8.642 22.131,-8.618 22.131,-8.593 22.15,-8.5 22.188,-8.409 22.24,-8.33 22.275,-8.295 22.31,-8.26 22.389,-8.208 22.48,-8.17 22.573,-8.151 22.598,-8.151 22.622,-8.147 23.098,-8.147
  pour cut-out: 269 vertices and 0 holes, not listed, extent 8.143,-3.028 18.253,16.308
  pour cut-out: 189 vertices and 0 holes, not listed, extent 11.654,-9.109 19.416,-6.491
  pour cut-out: 251 vertices and 0 holes, not listed, extent 16.031,-8.495 24.99,-6.751
  pour cut-out: 9.607,-3.464 9.689,-3.519 9.744,-3.601 9.764,-3.698 9.764,-4.898 9.744,-4.995 9.689,-5.077 9.607,-5.132 9.574,-5.139 9.574,-9.263 9.578,-9.284 9.574,-9.3 9.576,-9.317 9.526,-9.694 9.515,-9.725 9.509,-9.758 9.363,-10.109 9.345,-10.137 9.33,-10.167 9.099,-10.468 9.098,-10.469 9.086,-10.479 9.077,-10.492 9.077,-10.493 9.077,-10.494 9.076,-10.494 9.075,-10.494 9.062,-10.503 9.052,-10.515 9.051,-10.516 8.75,-10.747 8.72,-10.762 8.692,-10.78 8.341,-10.926 8.308,-10.932 8.277,-10.943 7.969,-10.983 7.94,-11.003 7.876,-11.03 7.849,-11.041 7.781,-11.054 7.756,-11.054 7.731,-11.059 6.381,-11.059 6.356,-11.054 6.331,-11.054 6.263,-11.041 6.225,-11.025 6.172,-11.003 6.114,-10.964 6.044,-10.894 6.005,-10.836 5.978,-10.772 5.967,-10.745 5.954,-10.677 5.954,-10.577 5.967,-10.509 5.983,-10.471 6.005,-10.418 6.044,-10.36 6.114,-10.29 6.172,-10.251 6.236,-10.224 6.263,-10.213 6.331,-10.2 6.356,-10.2 6.381,-10.195 7.731,-10.195 7.756,-10.2 7.781,-10.2 7.849,-10.213 7.887,-10.229 7.94,-10.251 7.949,-10.257 8.121,-10.234 8.358,-10.136 8.551,-9.988 8.557,-9.979 8.558,-9.978 8.559,-9.977 8.559,-9.976 8.56,-9.976 8.561,-9.975 8.562,-9.974 8.571,-9.968 8.719,-9.775 8.817,-9.538 8.849,-9.296 8.846,-9.284 8.846,-5.139 8.813,-5.132 8.731,-5.077 8.676,-4.995 8.656,-4.898 8.656,-3.698 8.676,-3.601 8.731,-3.519 8.813,-3.464 8.91,-3.444 9.51,-3.444
Int1 (GND):
  pour cut-out: 9.97,42.1 ccw(c9.97,39.814) 7.684,39.814 7.684,38.35 ccw(c10.224,38.35) 10.224,35.81 11.533,35.81 ccw(c11.533,38.039) 13.762,38.039 13.762,38.72
  pour cut-out: 39.942,42.1 cw(c39.942,39.814) 42.228,39.814 42.228,39.074 cw(c39.688,39.074) 39.688,36.534 38.533,36.534 cw(c38.533,38.777) 36.289,38.777

## Silkscreen, mask and mechanical layers (free items; w line width, h text height)
Top Overlay:
  lines w0.254: 1.461,2.603 ccw(c2.731,2.603) 2.731,1.333 3.467,1.333 45.911,1.333 47.181,1.333 ccw(c47.181,2.603) 48.451,2.603 48.451,5.08 48.451,22.796 48.451,40.83 48.451,47.434 ccw(c47.562,47.434) 47.562,48.323 46.165,48.323 6.16,48.323 2.35,48.323 ccw(c2.35,47.434) 1.461,47.434 1.461,38.544 1.461,4.508 1.461,2.603
  text "OCXO timebase" at 17.463,49.593 h1.52
  text "Micron-GLIN v.2 / (c)Shodan (Tula, Russia) / https://ampnuts.com" at 39.545,-5.291 h2.7 r270
  text "JTAG" at 10.033,-21.844 h1.52 r270

## Dimensions
46.527,-39.136 to 49.937,-41.136 on Mechanical 1
3.347,-39.136 to -0.063,-41.136 on Mechanical 1
3.347,-39.136 to -0.063,-41.136 on Mechanical 1
3.347,56.864 to 0.318,58.864 on Mechanical 1
3.347,56.864 to -0.063,57.594 on Mechanical 1
46.527,56.864 to 49.937,58.864 on Mechanical 1

## Text inside footprints (layer, text, board x,y; h text height)
P1: Bottom Overlay "36" at 1.823,-37.104 h0.75; Bottom Overlay "35" at 1.823,-39.644 h0.75; Bottom Overlay "1" at 48.813,-39.263 h0.75; Bottom Overlay "2" at 48.94,-36.85 h0.75
P2: Bottom Overlay "36" at 1.823,56.356 h0.75; Bottom Overlay "35" at 1.823,53.816 h0.75; Bottom Overlay "1" at 49.067,53.816 h0.75; Bottom Overlay "2" at 49.149,56.388 h0.75